# Altium PCB FMC_DIO_32ch_lvds_a.PcbDoc (part 4 of 6)
Units mm, origin at the board's own origin, x right, y up, seen from the top; angles counter-clockwise.
Board outline 69.13 x 77.46 mm, 4 copper layers (Top Layer, G, SUP, Bottom Layer), stack 1.448 mm thick; 558 components, 348 nets, 1996 pads, 784 vias.
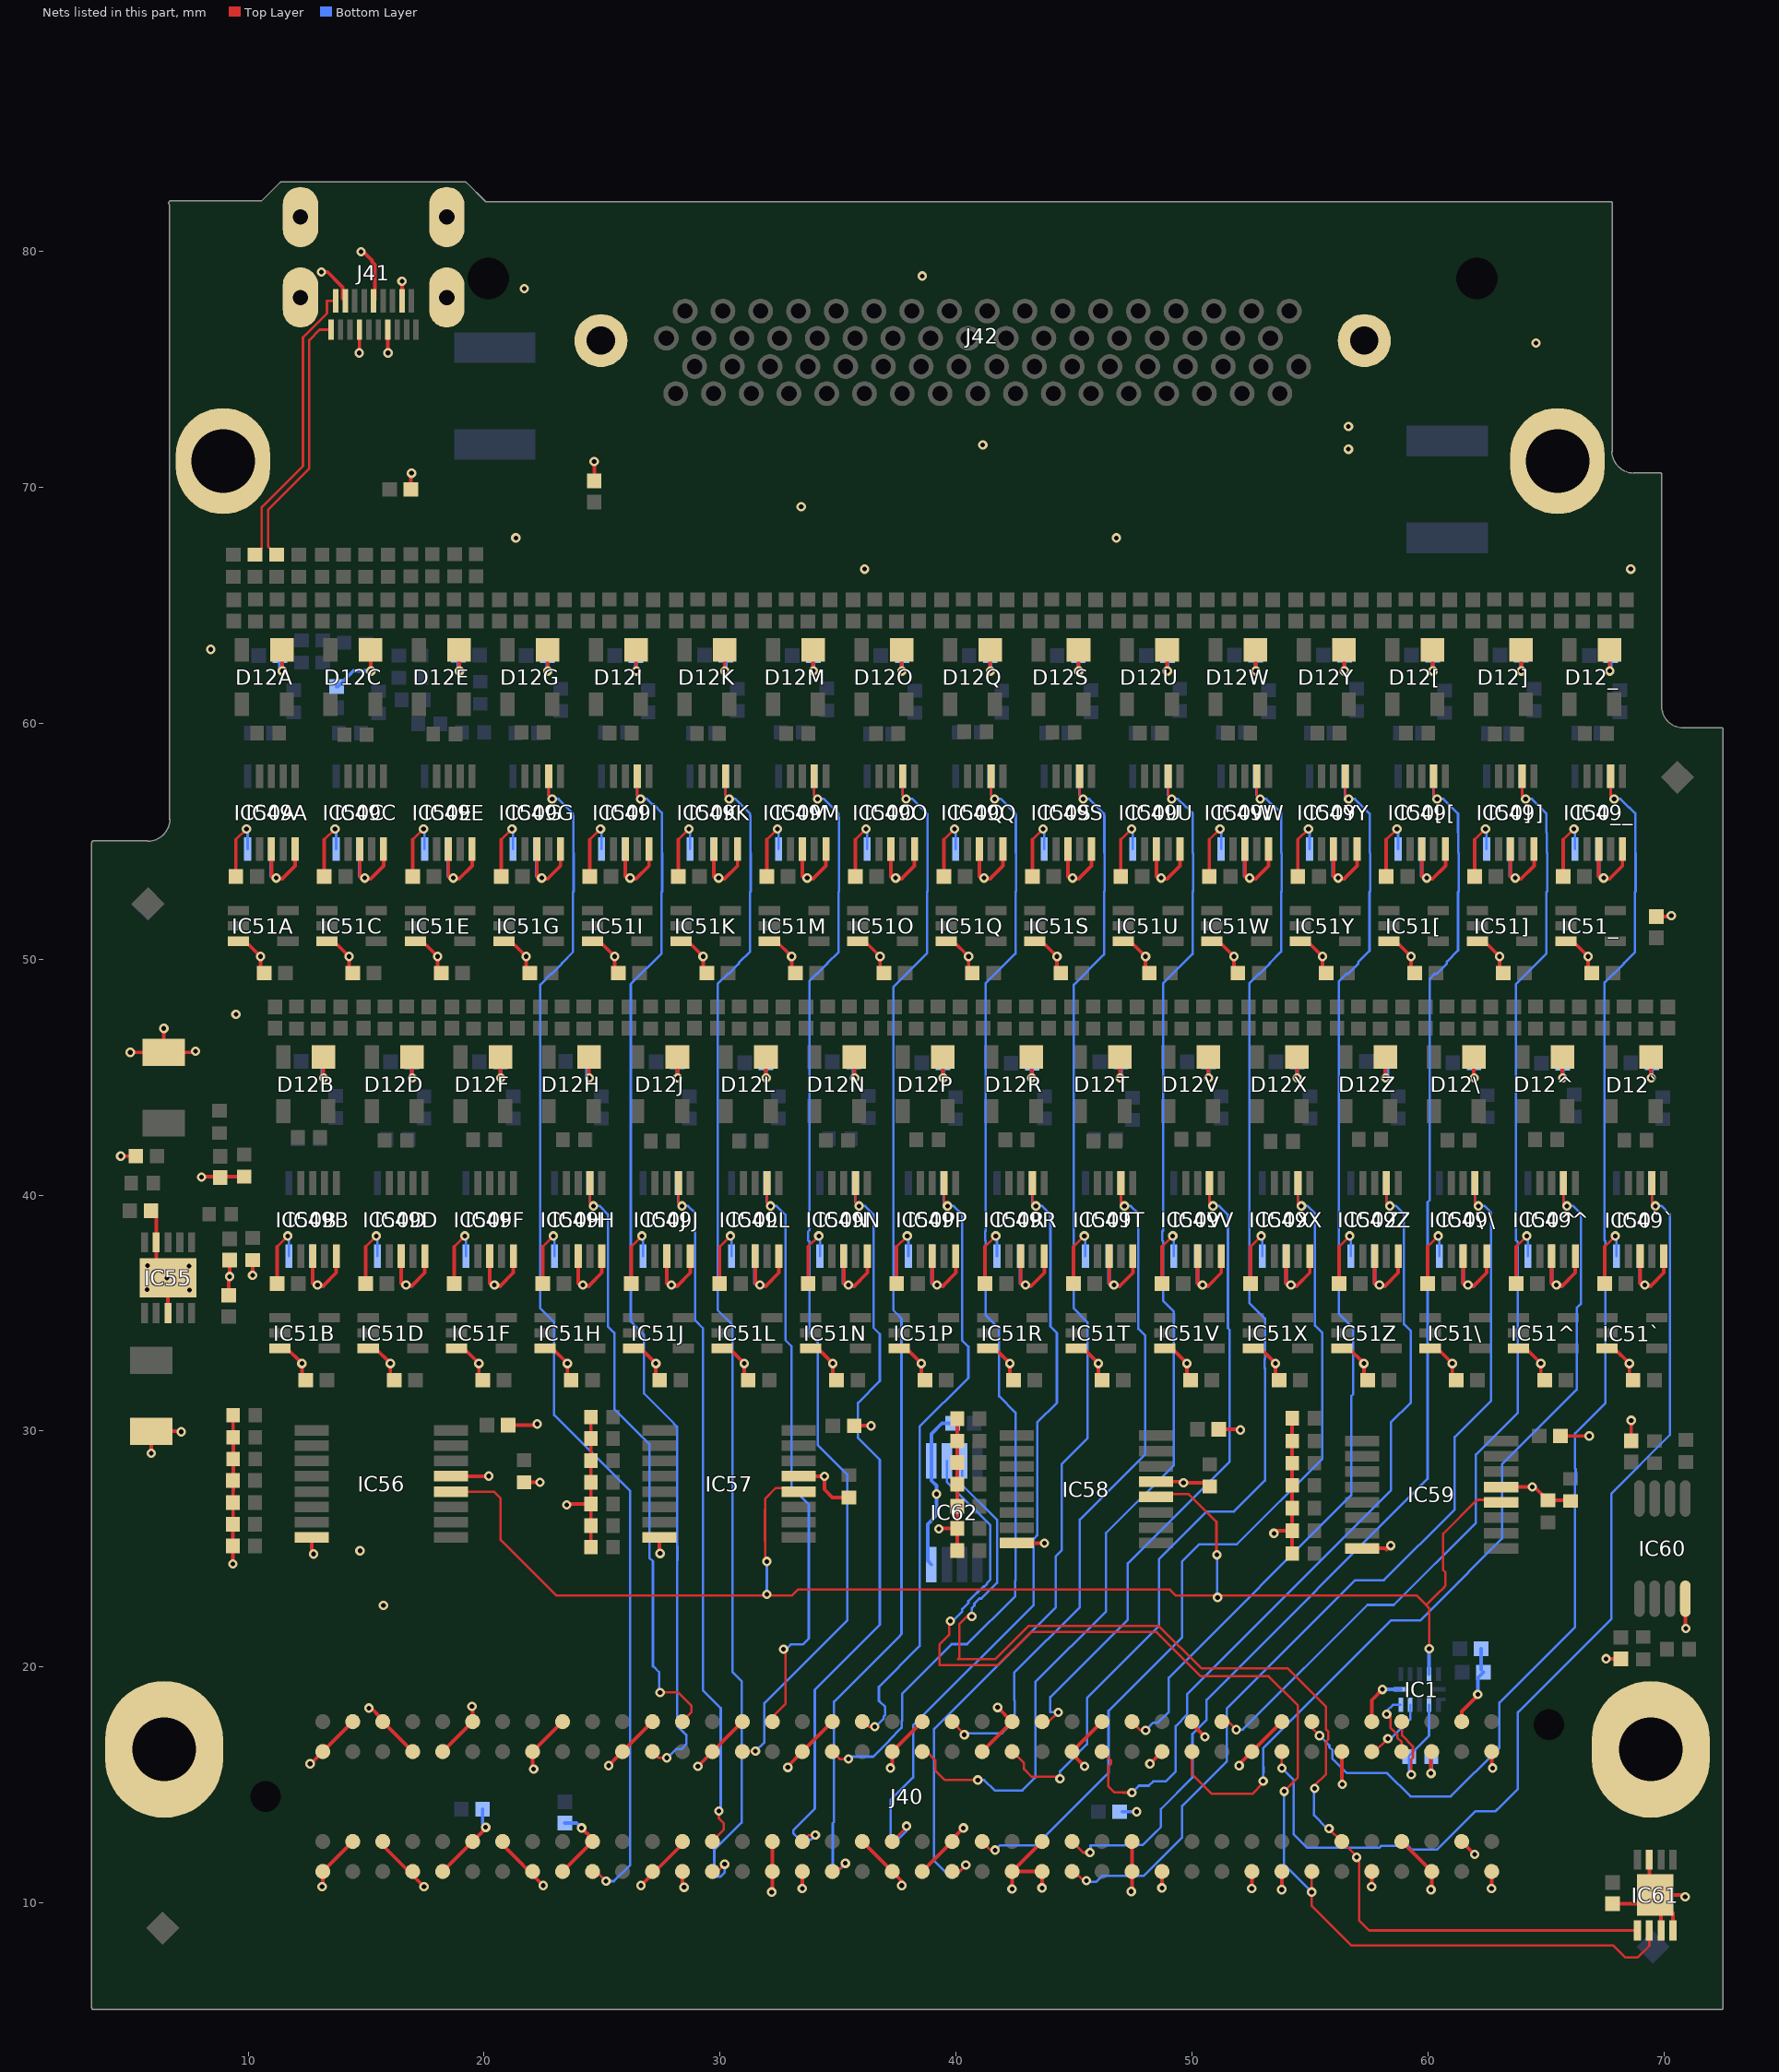
[diagram p6: the nets of this part, all layers, seen from the top]

## Via types
v1: diameter 0.4, hole 0.2, Top Layer to Bottom Layer, tented both sides, 760 vias
v2: diameter 0.4, hole 0.2, Top Layer to Bottom Layer, 24 vias

## Nets (pads, with @x,y where several pads share a name; then routed paths per layer and width w, separated by ;. In a path a pad name is that pad's centre, name@x,y a point inside that pad or via, vN(x,y) a via of type N, cw(c..) or ccw(c..) an arc to the next point about the centre after c; other vN are vias at no path point) (continued)
FMC1_P7: IC49G.6 IC50G.8 J40.c10 | length 52
  Top Layer w0.102: IC49G.6@22.736,57.761 22.736,56.936 v1(22.882,56.79) ; J40.c10@24.592,11.336 24.758,11.336 v1(25.166,10.927)
  Bottom Layer w0.102: IC50G.8@22.728,57.761 22.728,56.944 v1(22.882,56.79) 23.146,56.79 23.768,56.169 23.768,56.086 23.781,56.073 23.781,55.355 23.781,54.512 23.794,54.499 23.794,52.878 23.768,52.852 23.768,50.311 23.296,49.839 23.296,49.811 22.867,49.382 22.839,49.382 22.377,48.92 22.377,35.204 22.962,34.62 22.962,30.683 26.188,27.457 26.188,11.619 25.496,10.927 v1(25.166,10.927)
FMC1_P8: IC49H.6 IC50H.8 J40.h13 | length 26.4
  Top Layer w0.102: IC49H.6@24.486,40.511 24.486,39.686 v1(24.632,39.54) ; v1(27.457,18.923) 28.219,18.923 28.778,18.364 28.778,18.085 28.402,17.709 J40.h13@28.402,17.686
  Bottom Layer w0.102: IC50H.8@24.478,40.511 24.478,39.694 v1(24.632,39.54) 24.896,39.54 25.245,39.192 25.245,34.436 25.518,34.163 25.518,30.946 27.005,29.459 27.005,24.628 27.153,24.481 27.153,20.025 27.172,20.025 27.416,19.781 27.416,18.964 v1(27.457,18.923)
FMC1_P9: IC49I.6 IC50I.8 J40.g12 | length 46
  Top Layer w0.102: IC49I.6@26.486,57.761 26.486,56.936 v1(26.632,56.79) ; J40.g12@27.132,16.416 27.393,16.154 v1(27.737,16.154)
  Bottom Layer w0.102: IC50I.8@26.478,57.761 26.478,56.944 v1(26.632,56.79) 26.896,56.79 27.134,56.553 27.187,56.553 27.531,56.209 27.531,56.184 27.531,55.355 27.531,54.512 27.544,54.499 27.544,52.878 27.518,52.852 27.518,50.251 26.213,48.946 26.213,34.646 26.772,34.087 26.772,31.597 28.042,30.327 28.042,30.309 28.176,30.174 28.176,25.132 28.189,25.119 28.189,24.513 28.176,24.5 28.176,18.322 28.176,17.509 28.443,17.243 28.562,17.124 28.562,16.781 28.562,16.73 28.355,16.523 28.134,16.523 27.766,16.154 v1(27.737,16.154)
FMC1_P10: IC49J.6 IC50J.8 J40.d14 | length 30.1
  Top Layer w0.102: IC49J.6@28.236,40.511 28.236,39.686 v1(28.382,39.54) ; J40.d14@29.672,12.606 29.672,12.629 30.15,13.106 30.15,13.386 29.947,13.589 v1(29.947,13.894)
  Bottom Layer w0.102: IC50J.8@28.228,40.511 28.228,39.694 v1(28.382,39.54) 28.646,39.54 28.944,39.243 28.944,34.69 29.268,34.366 29.268,19.017 30.023,18.262 30.023,13.97 v1(29.947,13.894)
FMC1_P11: IC49K.6 IC50K.8 J40.c14 | length 51.2
  Top Layer w0.102: J40.c14@29.672,11.336 29.882,11.336 v1(30.192,11.646) ; IC49K.6@30.236,57.761 30.236,56.936 v1(30.382,56.79)
  Bottom Layer w0.102: v1(30.192,11.646) 30.192,11.294 30.023,11.125 29.794,11.125 29.752,11.167 29.752,12.252 30.912,13.411 30.912,19.405 30.531,19.786 30.531,34.493 29.896,35.128 29.896,48.946 30.332,49.382 30.367,49.382 30.796,49.811 30.796,49.846 31.268,50.318 31.268,52.852 31.294,52.878 31.294,54.499 31.281,54.512 31.281,55.355 31.281,56.066 31.268,56.079 31.268,56.169 30.646,56.79 v1(30.382,56.79) 30.228,56.944 IC50K.8@30.228,57.761
FMC1_P12: IC49L.6 IC50L.8 J40.h16 | length 25.6
  Top Layer w0.102: IC49L.6@31.986,40.511 31.986,39.686 v1(32.132,39.54) ; J40.h16@32.212,17.686 32.212,17.887 32.766,18.44 32.766,20.549
  Bottom Layer w0.102: IC50L.8@31.978,40.511 31.978,39.694 v1(32.132,39.54) 32.396,39.54 32.77,39.167 32.77,33.852 33.018,33.604 33.018,27.637 33.757,26.898 33.757,21.209 33.503,20.955 32.995,20.955 32.791,20.752 v1(32.69,20.752)
FMC1_P13: IC49M.6 IC50M.8 J40.g15 | length 46.4
  Top Layer w0.102: J40.g15@30.942,16.416 30.96,16.434 v1(31.496,16.434) ; IC49M.6@33.986,57.761 33.986,56.936 v1(34.132,56.79)
  Bottom Layer w0.102: v1(31.496,16.434) 31.877,16.815 31.877,18.47 34.658,21.251 35.382,21.975 35.382,28.162 34.138,29.407 34.138,33.778 33.779,34.137 33.779,38.032 33.728,38.083 33.728,38.458 33.779,38.509 33.779,49.07 34.091,49.382 34.117,49.382 34.546,49.811 34.546,49.837 35.018,50.309 35.018,52.852 35.044,52.878 35.044,54.499 35.031,54.512 35.031,55.999 35.018,56.012 35.018,56.169 34.396,56.79 v1(34.132,56.79) 33.978,56.944 IC50M.8@33.978,57.761
FMC1_P14: IC49N.6 IC50N.8 J40.d17 | length 33.3
  Top Layer w0.102: J40.d17@33.482,12.606 33.754,12.878 v1(34.036,12.878) ; IC49N.6@35.736,40.511 35.736,39.686 v1(35.882,39.54)
  Bottom Layer w0.102: v1(34.036,12.878) 33.846,12.687 33.74,12.687 33.363,12.687 33.096,12.954 33.096,13.081 34.011,13.995 34.011,19.036 36.768,21.793 36.768,28.786 35.839,29.714 35.839,31.191 36.768,32.12 36.768,34.112 36.495,34.386 36.495,39.192 36.146,39.54 v1(35.882,39.54) 35.728,39.694 IC50N.8@35.728,40.511
FMC1_P15: IC49O.6 IC50O.8 J40.c18 | length 51.2
  Top Layer w0.102: J40.c18@34.752,11.336 34.958,11.336 v1(35.306,11.684) ; IC49O.6@37.736,57.761 37.736,56.936 v1(37.882,56.79)
  Bottom Layer w0.102: v1(35.306,11.684) 35.077,11.455 34.874,11.455 34.773,11.557 34.773,13.386 34.823,13.437 34.823,18.528 37.617,21.322 37.617,21.34 37.686,21.409 37.686,34.762 37.617,34.831 37.617,34.849 37.338,35.128 37.338,48.819 38.768,50.249 38.768,52.852 38.794,52.878 38.794,54.499 38.781,54.512 38.781,55.355 38.781,56.161 38.49,56.451 38.485,56.451 38.146,56.79 v1(37.882,56.79) 37.728,56.944 IC50O.8@37.728,57.761
FMC1_P16: IC49P.6 IC50P.8 J40.h19 | length 27.1
  Top Layer w0.102: J40.h19@36.068,17.704 36.297,17.475 v1(36.551,17.475) ; IC49P.6@39.486,40.511 39.486,39.686 v1(39.632,39.54)
  Bottom Layer w0.102: v1@36.569,17.456 36.926,17.812 36.926,17.897 36.992,17.963 36.992,18.308 36.748,18.551 36.728,18.551 36.728,19.163 38.456,20.89 38.456,30.186 40.518,32.249 40.518,33.579 40.259,33.838 40.259,39.178 39.896,39.54 v1(39.632,39.54) 39.478,39.694 IC50P.8@39.478,40.511
FMC1_P17: IC49Q.6 IC50Q.8 J40.g18 | length 49.1
  Top Layer w0.102: J40.g18@34.752,16.416 35.064,16.104 v1(35.433,16.104) ; IC49Q.6@41.486,57.761 41.486,56.936 v1(41.632,56.79)
  Bottom Layer w0.102: v1(35.433,16.104) 35.534,16.205 36.488,16.205 37.16,16.877 37.16,16.895 37.693,17.428 37.693,17.712 37.706,17.724 37.706,18.87 39.807,20.971 40.465,20.971 42.507,23.013 42.507,23.671 42.52,23.684 42.52,30.785 41.824,31.48 41.824,33.207 41.811,33.22 41.811,34.359 41.25,34.921 41.25,38.061 41.228,38.083 41.228,38.458 41.25,38.479 41.25,48.971 42.518,50.24 42.518,52.852 42.544,52.878 42.544,54.499 42.531,54.512 42.531,55.355 42.531,56.094 42.518,56.106 42.518,56.169 41.896,56.79 v1(41.632,56.79) 41.478,56.944 IC50Q.8@41.478,57.761
FMC1_P18: IC49R.6 IC50R.8 J40.d20 | length 34.2
  Top Layer w0.102: J40.d20@37.292,12.606 37.897,13.21 v1(37.897,13.259) ; IC49R.6@43.236,40.511 43.236,39.686 v1(43.382,39.54)
  Bottom Layer w0.102: v1(37.897,13.259) 37.897,13.052 37.603,12.758 37.254,12.758 37.219,12.794 37.219,14.359 38.176,15.316 38.176,17.53 43.286,22.64 43.286,25.435 43.434,25.583 43.434,30.364 44.268,31.198 44.268,34.163 43.995,34.436 43.995,39.192 43.646,39.54 v1(43.382,39.54) 43.228,39.694 IC50R.8@43.228,40.511
FMC1_P19: IC49S.6 IC50S.8 J40.c22 | length 53.5
  Top Layer w0.102: J40.c22@39.832,11.336 40.139,11.336 v1(40.411,11.608) ; IC49S.6@45.236,57.761 45.236,56.936 v1(45.382,56.79)
  Bottom Layer w0.102: v1(40.411,11.608) 40.081,11.278 39.573,11.278 39.065,11.786 39.065,17.385 44.221,22.541 44.221,24.695 44.471,24.944 44.471,28.596 45.568,29.693 45.568,34.62 44.978,35.21 44.978,38.458 44.983,38.463 44.983,48.92 46.268,50.205 46.268,52.852 46.294,52.878 46.294,54.499 46.281,54.512 46.281,56.077 46.268,56.09 46.268,56.169 45.646,56.79 v1(45.382,56.79) 45.228,56.944 IC50S.8@45.228,57.761
FMC1_P20: IC49T.6 IC50T.8 J40.h22 | length 29.8
  Top Layer w0.102: J40.h22@39.832,17.686 40.347,17.17 v1(40.347,17.133) ; IC49T.6@46.986,40.511 46.986,39.686 v1(47.132,39.54)
  Bottom Layer w0.102: v1(40.347,17.133) 40.41,17.196 41.949,17.196 42.469,17.715 42.469,17.982 42.477,17.99 42.477,18.586 42.469,18.594 42.469,19.772 45.237,22.541 45.237,26.249 48.018,29.03 48.018,34.036 47.719,34.335 47.719,39.218 47.396,39.54 v1(47.132,39.54) 46.978,39.694 IC50T.8@46.978,40.511
FMC1_P21: IC49U.6 IC50U.8 J40.g21 | length 53.2
  Top Layer w0.102: J40.g21@38.562,16.416 38.753,16.416 39.116,16.053 39.116,15.625 39.526,15.215 v1(40.919,15.215) ; IC49U.6@48.986,57.761 48.986,56.936 v1(49.132,56.79)
  Bottom Layer w0.102: v1(40.919,15.215) 41.19,15.215 41.634,14.77 42.808,14.77 43.358,15.32 43.358,19.366 46.355,22.363 46.355,25.69 49.225,28.561 49.225,35.067 48.768,35.524 48.768,38.043 48.728,38.083 48.728,38.458 48.768,38.498 48.768,48.971 50.018,50.221 50.018,52.852 50.044,52.878 50.044,54.499 50.031,54.512 50.031,56.188 49.767,56.451 49.735,56.451 49.396,56.79 v1(49.132,56.79) 48.978,56.944 IC50U.8@48.978,57.761
FMC1_P22: IC49V.6 IC50V.8 J40.h25 | length 28.4
  Top Layer w0.102: J40.h25@43.642,17.686 J40.h25@43.822,17.686 ; J40.h25@43.822,17.813 J40.h25@43.822,17.686 ; v1(44.323,18.085) 43.924,17.686 J40.h25@43.822,17.686 ; IC49V.6@50.736,40.511 50.736,39.686 v1(50.882,39.54)
  Bottom Layer w0.102: v1(44.323,18.085) 43.993,18.085 43.993,18.731 47.269,22.007 47.269,24.395 51.592,28.718 51.592,34.288 51.52,34.36 51.52,39.167 51.146,39.54 v1(50.882,39.54) 50.728,39.694 IC50V.8@50.728,40.511
FMC1_P23: IC49W.6 IC50W.8 J40.g24 | length 51.9
  Top Layer w0.102: J40.g24@42.372,16.416 42.385,16.416 42.875,15.926 42.875,15.676 43.197,15.354 44.31,15.354 v1(44.399,15.265) ; IC49W.6@52.736,57.761 52.736,56.936 v1(52.882,56.79)
  Bottom Layer w0.102: v1(44.399,15.265) 44.399,15.581 45.542,16.724 45.542,18.68 48.59,21.728 48.59,24.562 50.622,26.594 51.779,26.594 53.086,27.9 53.086,32.665 53.074,32.677 53.074,33.052 53.086,33.064 53.086,34.772 52.426,35.433 52.426,48.971 52.837,49.382 52.867,49.382 53.296,49.811 53.296,49.842 53.768,50.314 53.768,52.852 53.794,52.878 53.794,54.499 53.781,54.512 53.781,56.197 53.501,56.477 53.46,56.477 53.146,56.79 v1(52.882,56.79) 52.728,56.944 IC50W.8@52.728,57.761
FMC1_P24: IC49X.6 IC50X.8 J40.d23 | length 38.2
  Top Layer w0.102: J40.d23@41.102,12.606 41.465,12.243 v1(41.656,12.243) ; IC49X.6@54.486,40.511 54.486,39.686 v1(54.632,39.54)
  Bottom Layer w0.102: v1(41.656,12.243) 41.859,12.446 43.397,12.446 46.443,15.492 46.457,15.505 46.457,18.147 49.581,21.271 49.581,24.481 50.308,25.208 51.9,25.208 55.518,28.826 55.518,34.163 55.207,34.474 55.207,39.23 54.896,39.54 v1(54.632,39.54) 54.478,39.694 IC50X.8@54.478,40.511
FMC1_P25: IC49Y.6 IC50Y.8 J40.h28 | length 47.4
  Top Layer w0.102: J40.h28@47.452,17.686 47.815,17.323 v1(48.031,17.323) ; IC49Y.6@56.486,57.761 56.486,56.936 v1(56.632,56.79)
  Bottom Layer w0.102: v1(48.031,17.323) 48.355,17.647 48.548,17.647 49.009,18.108 49.009,19.545 56.738,27.274 56.738,31.476 56.825,31.563 56.825,32.676 56.824,32.677 56.824,33.052 56.825,33.053 56.825,34.361 56.21,34.976 56.21,49.047 56.545,49.382 56.617,49.382 57.046,49.811 57.046,49.883 57.518,50.355 57.518,52.852 57.544,52.878 57.544,54.499 57.531,54.512 57.531,55.355 57.531,56.156 57.518,56.169 56.896,56.79 v1(56.632,56.79) 56.478,56.944 IC50Y.8@56.478,57.761
FMC1_P26: IC49Z.6 IC50Z.8 J40.g27 | length 35.7
  Top Layer w0.102: J40.g27@46.182,16.416 46.558,16.04 46.558,15.899 46.444,15.785 46.444,14.952 46.702,14.694 47.053,14.694 47.066,14.681 v1(47.447,14.681) ; IC49Z.6@58.236,40.511 58.236,39.686 v1(58.382,39.54)
  Bottom Layer w0.102: v1(47.447,14.681) 47.739,14.973 48.163,14.973 48.345,15.155 48.882,15.155 49.301,15.574 49.301,17.501 49.795,17.994 49.795,18.858 58.42,27.483 58.42,30.364 59.268,31.212 59.268,34.239 58.979,34.528 58.979,39.208 58.646,39.54 v1(58.382,39.54) 58.228,39.694 IC50Z.8@58.228,40.511
FMC1_P27: IC49[.6 IC50[.8 J40.d26 | length 56
  Top Layer w0.102: J40.d26@44.912,12.606 45.377,12.141 v1(45.669,12.141) ; IC49[.6@60.236,57.761 60.236,56.936 v1(60.382,56.79)
  Bottom Layer w0.102: v1(45.669,12.141) 45.695,12.167 45.695,12.446 47.157,12.446 47.17,12.459 47.913,12.459 48.349,12.894 48.679,13.225 48.679,13.987 50.013,15.32 50.013,17.17 50.611,17.769 50.611,18.611 59.978,27.978 59.978,39.702 60.071,39.795 60.071,49.174 60.279,49.382 60.367,49.382 60.796,49.811 60.796,49.899 61.268,50.371 61.268,52.852 61.294,52.878 61.294,54.499 61.281,54.512 61.281,55.355 61.268,55.367 61.268,56.169 60.646,56.79 v1(60.382,56.79) 60.228,56.944 IC50[.8@60.228,57.761
FMC1_P28: IC49\.6 IC50\.8 J40.c26 | length 41
  Top Layer w0.102: J40.c26@44.912,11.336 45.02,11.336 v1@45.45,10.906 ; IC49\.6@61.986,40.511 61.986,39.686 v1(62.132,39.54)
  Bottom Layer w0.102: v1@45.45,10.906 45.45,10.897 45.923,10.897 46.177,11.15 47.944,11.15 49.581,12.787 49.581,14.122 51.473,16.015 51.473,18.25 56.909,23.685 58.124,23.685 61.125,26.687 61.125,29.746 62.668,31.289 62.668,39.268 62.396,39.54 v1(62.132,39.54) 61.978,39.694 IC50\.8@61.978,40.511
  other v1: 45.517,10.947
FMC1_P29: IC49].6 IC50].8 J40.h31 | length 49.1
  Top Layer w0.102: J40.h31@51.262,17.686 51.529,17.686 v1(51.867,17.348) ; IC49].6@63.986,57.761 63.986,56.936 v1(64.132,56.79)
  Bottom Layer w0.102: v1(51.867,17.348) 52.146,17.348 57.429,22.631 58.543,22.631 62.027,26.115 62.027,29.011 63.805,30.789 63.805,38.006 63.728,38.083 63.728,48.945 65.018,50.235 65.018,52.852 65.044,52.878 65.044,54.499 65.031,54.512 65.031,55.355 65.018,55.367 65.018,56.169 64.396,56.79 v1(64.132,56.79) 63.978,56.944 IC50].8@63.978,57.761
FMC1_P30: IC49^.6 IC50^.8 J40.g30 | length 37.7
  Top Layer w0.102: J40.g30@49.992,16.416 49.992,15.464 50.825,14.63 52.553,14.63 53.01,15.088 v1(53.01,15.164) ; IC49^.6@65.736,40.511 65.736,39.686 v1(65.882,39.54)
  Bottom Layer w0.102: v1(53.01,15.164) 53.01,15.523 53.023,15.536 53.023,15.757 53.01,15.77 53.01,16.561 58.42,21.971 59.665,21.971 61.307,23.613 61.313,23.613 61.705,24.005 61.705,24.012 63.132,25.438 63.132,28.592 66.294,31.754 66.294,35.208 66.47,35.385 66.47,39.216 66.146,39.54 v1(65.882,39.54) 65.728,39.694 IC50^.8@65.728,40.511
FMC1_P31: IC49_.6 IC50_.8 J40.h34 | length 55.8
  Top Layer w0.102: J40.h34@55.072,17.686 55.072,17.419 v1(55.397,17.094) ; IC49_.6@67.736,57.761 67.736,56.936 v1(67.882,56.79)
  Bottom Layer w0.102: v1(55.397,17.094) 55.816,16.675 55.816,16.603 55.945,16.474 55.945,16.114 56.553,15.507 58.259,15.507 59.249,14.516 60.962,14.516 63.019,16.573 63.019,18.493 66.229,21.702 66.229,27.772 66.251,27.795 66.251,28.39 66.229,28.413 66.229,29.91 67.513,31.195 67.513,38.048 67.478,38.083 67.478,49.012 67.848,49.382 67.867,49.382 68.296,49.811 68.296,49.83 68.768,50.302 68.768,52.852 68.794,52.878 68.794,54.499 68.781,54.512 68.781,56.183 68.538,56.426 68.511,56.426 68.146,56.79 v1(67.882,56.79) 67.728,56.944 IC50_.8@67.728,57.761
FMC1_P32: IC49`.6 IC50`.8 J40.g33 | length 44.5
  Top Layer w0.102: v1(53.802,15.718) J40.g33@53.802,16.416 ; IC49`.6@69.486,40.511 69.486,39.686 v1(69.632,39.54)
  Bottom Layer w0.102: v1(53.802,15.718) 54.304,15.216 54.304,12.908 54.872,12.34 57.923,12.34 57.999,12.417 59.16,12.417 59.316,12.26 60.377,12.26 62.01,13.894 62.861,13.894 62.925,13.957 63.805,14.837 63.805,18.089 67.767,22.051 67.767,27.356 70.245,29.833 70.245,39.192 69.896,39.54 v1(69.632,39.54) 69.478,39.694 IC50`.8@69.478,40.511
GA0: IC61.2 IC62.6 J40.c34 | length 53.5
  Top Layer w0.102: v1(39.752,21.945) 39.7,21.996 39.7,21.361 39.294,20.955 39.294,20.078 41.758,20.078 43.168,21.488 48.488,21.488 50.368,19.609 53.238,19.609 54.483,18.364 54.483,15.316 v2(53.899,14.732) ; J40.c34@55.072,11.336 55.072,9.876 56.744,8.204 67.843,8.204 68.351,7.696 68.885,7.696 69.371,8.183 IC61.2@69.371,8.838
  Bottom Layer w0.102: IC62.6@39.604,28.743 39.604,27.859 41.453,26.01 41.453,23.698 41.307,23.552 41.307,23.519 41.202,23.415 41.17,23.415 40.916,23.162 40.886,23.162 40.516,22.791 40.516,22.714 40.259,22.457 40.259,22.351 v1@39.929,22.021 ; v2(53.899,14.732) 53.899,11.633 v1(55.067,10.465)
GA1: IC61.1 IC62.7 J40.d35 | length 49.6
  Top Layer w0.102: v1(40.665,22.149) 40.564,22.25 40.13,21.816 40.13,20.381 40.081,20.332 41.653,20.332 43.063,21.742 48.593,21.742 50.397,19.939 54.051,19.939 55.677,18.313 55.677,17.349 55.775,17.251 55.775,16.938 55.677,16.839 55.677,15.469 55.194,14.986 v2(55.194,14.859) ; v2(55.804,13.157) 55.804,13.144 J40.d35@56.342,12.606 v1@56.991,11.957 ; v1@57.074,11.874 57.074,9.271 57.507,8.838 IC61.1@68.871,8.838
  Bottom Layer w0.102: IC62.7@40.254,28.743 40.254,27.717 41.732,26.238 41.732,23.571 41.069,22.908 40.992,22.908 40.77,22.686 40.77,22.609 40.665,22.504 v1(40.665,22.149) ; v2(55.194,14.859) 55.169,14.859 55.169,13.716 55.728,13.157 v2(55.804,13.157)
  other v1: 56.972,11.938
GND: B8.1 B9.1 B10.1 B11.1 C1.2 C2.2 C127[.1 C127\.1 C127].1 C127^.1 C127_.1 C127`.1 C127A.1 C127B.1 C127C.1 C127D.1 C127E.1 C127F.1 C127G.1 C127H.1 C127I.1 C127J.1 C127K.1 C127L.1 C127M.1 C127N.1 C127O.1 C127P.1 C127Q.1 C127R.1 C127S.1 C127T.1 C127U.1 C127V.1 C127W.1 C127X.1 C127Y.1 C127Z.1 C128[.1 C128\.1 C128].1 C128^.1 C128_.1 C128`.1 C128A.1 C128B.1 C128C.1 C128D.1 C128E.1 C128F.1 C128G.1 C128H.1 C128I.1 C128J.1 C128K.1 C128L.1 C128M.1 C128N.1 C128O.1 C128P.1 C128Q.1 C128R.1 C128S.1 C128T.1 C128U.1 C128V.1 C128W.1 C128X.1 C128Y.1 C128Z.1 C139[.1 C139\.1 C139].1 C139^.1 C139_.1 C139`.1 C139A.1 C139B.1 C139C.1 C139D.1 C139E.1 C139F.1 C139G.1 C139H.1 C139I.1 C139J.1 C139K.1 C139L.1 C139M.1 C139N.1 C139O.1 C139P.1 C139Q.1 C139R.1 C139S.1 C139T.1 C139U.1 C139V.1 C139W.1 C139X.1 C139Y.1 C139Z.1 C146.1 C147.1 C148.1 C149.1 C150.2 C151.1 C152.1 C153.1 C154.1 C155.1 C156.1 C157.2 C158.2 C159.2 C160.2 C161.2 C162.2 C163.1 C164.1 C165.1 C166.1 D12[.1 D12\.1 D12].1 D12^.1 D12_.1 D12`.1 D12A.1 D12B.1 D12C.1 D12D.1 D12E.1 D12F.1 D12G.1 D12H.1 D12I.1 D12J.1 D12K.1 D12L.1 D12M.1 D12N.1 D12O.1 D12P.1 D12Q.1 D12R.1 D12S.1 D12T.1 D12U.1 D12V.1 D12W.1 D12X.1 D12Y.1 D12Z.1 IC1.6 IC49[.2 IC49[.4 IC49\.2 IC49\.4 IC49].2 IC49].4 IC49^.2 IC49^.4 IC49_.2 IC49_.4 IC49`.2 IC49`.4 IC49A.2 IC49A.4 IC49B.2 IC49B.4 IC49C.2 IC49C.4 IC49D.2 IC49D.4 IC49E.2 IC49E.4 IC49F.2 IC49F.4 IC49G.2 IC49G.4 IC49H.2 IC49H.4 IC49I.2 IC49I.4 IC49J.2 IC49J.4 IC49K.2 IC49K.4 IC49L.2 IC49L.4 IC49M.2 IC49M.4 IC49N.2 IC49N.4 IC49O.2 IC49O.4 IC49P.2 IC49P.4 IC49Q.2 IC49Q.4 IC49R.2 IC49R.4 IC49S.2 IC49S.4 IC49T.2 IC49T.4 IC49U.2 IC49U.4 IC49V.2 IC49V.4 IC49W.2 IC49W.4 IC49X.2 IC49X.4 IC49Y.2 IC49Y.4 IC49Z.2 IC49Z.4 IC50[.2 IC50[.4 IC50\.2 IC50\.4 IC50].2 IC50].4 IC50^.2 IC50^.4 IC50_.2 IC50_.4 IC50`.2 IC50`.4 IC50A.2 IC50A.4 IC50B.2 IC50B.4 IC50C.2 IC50C.4 IC50D.2 IC50D.4 IC50E.2 IC50E.4 IC50F.2 IC50F.4 IC50G.2 IC50G.4 IC50H.2 IC50H.4 IC50I.2 IC50I.4 IC50J.2 IC50J.4 IC50K.2 IC50K.4 IC50L.2 IC50L.4 IC50M.2 IC50M.4 IC50N.2 IC50N.4 IC50O.2 IC50O.4 IC50P.2 IC50P.4 IC50Q.2 IC50Q.4 IC50R.2 IC50R.4 IC50S.2 IC50S.4 IC50T.2 IC50T.4 IC50U.2 IC50U.4 IC50V.2 IC50V.4 IC50W.2 IC50W.4 IC50X.2 IC50X.4 IC50Y.2 IC50Y.4 IC50Z.2 IC50Z.4 IC51[.3 IC51\.3 IC51].3 IC51^.3 IC51_.3 IC51`.3 IC51A.3 IC51B.3 IC51C.3 IC51D.3 IC51E.3 IC51F.3 IC51G.3 IC51H.3 IC51I.3 IC51J.3 IC51K.3 IC51L.3 IC51M.3 IC51N.3 IC51O.3 IC51P.3 IC51Q.3 IC51R.3 IC51S.3 IC51T.3 IC51U.3 IC51V.3 IC51W.3 IC51X.3 IC51Y.3 IC51Z.3 IC55.4 IC55.8 IC55.11 IC56.8 IC56.13 IC57.8 IC57.13 IC58.8 IC58.13 IC59.8 IC59.13 IC60.4 IC61.3 IC61.4 IC61.7 IC61.9 IC62.4 IC62.5 J40.c1 J40.c4 J40.c5 J40.c8 J40.c9 J40.c12 J40.c13 J40.c16 J40.c17 J40.c20 J40.c21 J40.c24 J40.c25 J40.c28 J40.c29 J40.c32 J40.c33 J40.c36 J40.c38 J40.c40 J40.d2 J40.d3 J40.d6 J40.d7 J40.d10 J40.d13 J40.d16 J40.d19 J40.d22 J40.d25 J40.d28 J40.d37 J40.d39 J40.g1 J40.g4 J40.g5 J40.g8 J40.g11 J40.g14 J40.g17 J40.g20 J40.g23 J40.g26 J40.g29 J40.g32 J40.g35 J40.g38 J40.g40 J40.h2 J40.h3 J40.h6 J40.h9 J40.h12 J40.h15 J40.h18 J40.h21 J40.h24 J40.h27 J40.h30 J40.h33 J40.h36 J40.h39 J41.4 J41.7 J41.10 J41.13 J41.16 J41.SHIELD J42.69 J42.70 R2.1 R253.1 R255.1 R256.2 R257.2 R258.2 R259.2 R260.2 R261.2 R262.2 R263.2 R264.2 R269.2 R274.2 R279.2 R284.2 R289.2 R290.2 R291.2 R292.2 R293.2 R294.2 R295.2 R296.2 R297.2 R298.2 R299.2 R300.2 R301.2 R302.2 R303.2 R304.2 R305.2 R306.2 R307.2 R308.2 | length 534.8
  Top Layer w0.102: 9.477,55.067 v1(9.93,55.52) ; 11.227,37.817 v1(11.68,38.27) ; 13.227,55.067 v1(13.68,55.52) ; 14.977,37.817 v1(15.43,38.27) ; 16.977,55.067 v1(17.43,55.52) ; 18.727,37.817 v1(19.18,38.27) ; 20.727,55.067 v1(21.18,55.52) ; 22.477,37.817 v1(22.93,38.27) ; 24.477,55.067 v1(24.93,55.52) ; 26.227,37.817 v1(26.68,38.27) ; 28.227,55.067 v1(28.68,55.52) ; 29.977,37.817 v1(30.43,38.27) ; 31.977,55.067 v1(32.43,55.52) ; 33.727,37.817 v1(34.18,38.27) ; 35.727,55.067 v1(36.18,55.52) ; 37.477,37.817 v1(37.93,38.27) ; 39.477,55.067 v1(39.93,55.52) ; 41.227,37.817 v1(41.68,38.27) ; 43.227,55.067 v1(43.68,55.52) ; 44.977,37.817 v1(45.43,38.27) ; 46.977,55.067 v1(47.43,55.52) ; 48.727,37.817 v1(49.18,38.27) ; 50.727,55.067 v1(51.18,55.52) ; 52.477,37.817 v1(52.93,38.27) ; 54.477,55.067 v1(54.93,55.52) ; 56.227,37.817 v1(56.68,38.27) ; 58.227,55.067 v1(58.68,55.52) ; 59.977,37.817 v1(60.43,38.27) ; 61.977,55.067 v1(62.43,55.52) ; 63.727,37.817 v1(64.18,38.27) ; 65.727,55.067 v1(66.18,55.52) ; 67.477,37.817 v1(67.93,38.27)
  Top Layer w0.152: v1(4.597,41.656) C151.1@5.24,41.656 ; v1(5.004,46.05) 5.005,46.052 C147.1@6.426,46.052 ; C150.2@5.886,39.345 6.104,39.126 IC55.4@6.104,38 6.104,37 IC55.11@6.604,36.5 IC55.8@6.604,35 ; v1(5.893,29.058) C148.1@5.893,29.996 7.139,29.996 v1(7.163,29.972) ; v1(6.426,47.066) C147.1@6.426,46.052 ; v1(7.772,46.101) 7.723,46.052 C147.1@6.426,46.052 ; v1(8.026,40.767) 8.039,40.78 R255.1@9.83,40.78 ; C146.1@9.169,35.756 9.169,36.5 v1(9.22,36.551) C149.1@9.22,37.244 ; v1(9.347,24.375) 9.352,24.379 R263.2@9.352,25.137 R263.2@9.352,25.387 ; R262.2@9.352,26.042 R263.2@9.352,25.387 ; R257.2@9.36,30.674 R258.2@9.36,29.734 ; C128A.1@9.477,53.502 9.477,55.067 ; IC51A.3@9.586,50.761 9.88,50.761 v1(10.527,50.114) 10.527,49.571 C127A.1@10.686,49.411 ; v1(10.185,36.601) R253.1@10.185,37.249 ; IC49A.2@10.986,54.661 10.986,53.511 11.086,53.411 11.436,53.411 11.986,53.961 IC49A.4@11.986,54.661 ; C128B.1@11.227,36.252 11.227,37.817 ; IC51B.3@11.336,33.511 11.63,33.511 v1(12.277,32.864) 12.277,32.321 C127B.1@12.436,32.161 ; D12A.1@11.439,63.11 11.439,62.226 v1(11.451,62.214) ; v1(12.624,15.9) 12.647,15.9 J40.g1@13.162,16.416 J40.h2@14.432,17.686 ; IC56.8@12.696,25.487 12.696,24.87 v1(12.776,24.79) ; IC49B.2@12.736,37.411 12.736,36.261 12.836,36.161 13.186,36.161 13.736,36.711 IC49B.4@13.736,37.411 ; v1(13.106,79.121) 13.366,79.121 13.905,78.583 14.009,78.478 14.009,78.012 J41.4@14.116,77.905 ; v1(13.132,10.693) 13.162,10.724 J40.c1@13.162,11.336 J40.d2@14.432,12.606 ; D12B.1@13.189,45.86 13.189,44.976 v1(13.201,44.964) ; C128C.1@13.227,53.502 13.227,55.067 ; IC51C.3@13.336,50.761 13.63,50.761 v1(14.277,50.114) 14.277,49.571 C127C.1@14.436,49.411 ; v1(14.707,75.692) 14.716,75.702 J41.7@14.716,76.68 ; IC49C.2@14.736,54.661 14.736,53.511 14.836,53.411 15.186,53.411 15.736,53.961 IC49C.4@15.736,54.661 ; v1(14.783,79.985) 14.884,79.985 15.253,79.616 15.253,79.545 15.363,79.434 15.363,77.952 J41.10@15.316,77.905 ; C128D.1@14.977,36.252 14.977,37.817 ; IC51D.3@15.086,33.511 15.38,33.511 v1(16.027,32.864) 16.027,32.321 C127D.1@16.186,32.161 ; v1(15.113,18.263) 15.113,18.364 15.702,17.775 J40.h3@15.702,17.686 J40.g4@16.972,16.416 ; D12C.1@15.189,63.11 15.189,62.226 v1(15.201,62.214) ; J40.d3@15.702,12.606 15.702,12.441 v1(17.45,10.693) ; J41.13@15.916,76.68 15.916,75.702 v1(15.926,75.692) ; IC49D.2@16.486,37.411 16.486,36.261 16.586,36.161 16.936,36.161 17.486,36.711 IC49D.4@17.486,37.411 ; J41.16@16.516,77.905 v1(16.516,78.734) ; C158.2@16.891,69.91 16.891,70.564 v1(16.924,70.596) ; D12D.1@16.939,45.86 16.939,44.976 v1(16.951,44.964) ; C128E.1@16.977,53.502 16.977,55.067 ; IC51E.3@17.086,50.761 17.38,50.761 v1(18.027,50.114) 18.027,49.571 C127E.1@18.186,49.411 ; J40.c5@18.242,11.336 J40.d6@19.512,12.606 20.066,13.16 v1(20.066,13.208) ; J40.g5@18.242,16.416 J40.h6@19.512,17.686 19.512,18.308 v1(19.482,18.339) ; IC49E.2@18.486,54.661 18.486,53.511 18.586,53.411 18.936,53.411 19.486,53.961 IC49E.4@19.486,54.661 ; IC56.13@18.596,28.087 20.188,28.087 v1(20.193,28.092) ; C128F.1@18.727,36.252 18.727,37.817 ; IC51F.3@18.836,33.511 19.13,33.511 v1(19.777,32.864) 19.777,32.321 C127F.1@19.936,32.161 ; D12E.1@18.939,63.11 18.939,62.226 v1(18.951,62.214) ; IC49F.2@20.236,37.411 20.236,36.261 20.336,36.161 20.686,36.161 21.236,36.711 IC49F.4@21.236,37.411 ; D12F.1@20.689,45.86 20.689,44.976 v1(20.701,44.964) ; C128G.1@20.727,53.502 20.727,55.067 ; J40.d7@20.782,12.606 20.782,12.466 v1(22.504,10.744) ; IC51G.3@20.836,50.761 21.13,50.761 v1(21.777,50.114) 21.777,49.571 C127G.1@21.936,49.411 ; C156.1@21.024,30.251 22.2,30.251 v1(22.25,30.302) ; R256.2@21.692,27.826 v1(22.365,27.826) ; v1(22.098,15.672) 22.052,15.718 J40.g8@22.052,16.416 J40.h9@23.322,17.686 ; IC49G.2@22.236,54.661 22.236,53.511 22.336,53.411 22.686,53.411 23.236,53.961 IC49G.4@23.236,54.661 ; C128H.1@22.477,36.252 22.477,37.817 ; IC51H.3@22.586,33.511 22.88,33.511 v1(23.527,32.864) 23.527,32.321 C127H.1@23.686,32.161 ; D12G.1@22.689,63.11 22.689,62.226 v1(22.701,62.214) ; J40.c9@23.322,11.336 J40.d10@24.592,12.606 24.592,12.72 v1(24.13,13.183) ; v1(23.495,26.877) 23.533,26.915 R289.2@24.524,26.915 ; IC49H.2@23.986,37.411 23.986,36.261 24.086,36.161 24.436,36.161 24.986,36.711 IC49H.4@24.986,37.411 ; D12H.1@24.439,45.86 24.439,44.976 v1(24.451,44.964) ; C128I.1@24.477,53.502 24.477,55.067 ; R291.2@24.524,25.086 R290.2@24.524,26 R289.2@24.524,26.915 ; R269.2@24.524,30.598 R274.2@24.524,29.683 R279.2@24.524,28.743 R284.2@24.524,27.829 R289.2@24.524,26.915 ; IC51I.3@24.586,50.761 24.88,50.761 v1(25.527,50.114) 25.527,49.571 C127I.1@25.686,49.411 ; 24.663,70.612 v1(24.663,71.095) ; v1(25.273,15.824) 25.273,15.827 J40.g11@25.862,16.416 J40.h12@27.132,17.686 ; IC49I.2@25.986,54.661 25.986,53.511 26.086,53.411 26.436,53.411 26.986,53.961 IC49I.4@26.986,54.661 ; C128J.1@26.227,36.252 26.227,37.817 ; IC51J.3@26.336,33.511 26.63,33.511 v1(27.277,32.864) 27.277,32.321 C127J.1@27.436,32.161 ; D12I.1@26.439,63.11 26.439,62.226 v1(26.451,62.214) ; v1(26.645,10.744) 28.402,12.502 J40.d13@28.402,12.606 ; IC57.8@27.428,25.487 27.428,24.845 v1(27.457,24.816) ; IC49J.2@27.736,37.411 27.736,36.261 27.836,36.161 28.186,36.161 28.736,36.711 IC49J.4@28.736,37.411 ; D12J.1@28.189,45.86 28.189,44.976 v1(28.201,44.964) ; C128K.1@28.227,53.502 28.227,55.067 ; IC51K.3@28.336,50.761 28.63,50.761 v1(29.277,50.114) 29.277,49.571 C127K.1@29.436,49.411 ; J40.c13@28.402,11.336 28.402,10.739 v1(28.473,10.668) ; v1(29.058,15.799) 30.942,17.683 J40.h15@30.942,17.686 ; IC49K.2@29.736,54.661 29.736,53.511 29.836,53.411 30.186,53.411 30.736,53.961 IC49K.4@30.736,54.661 ; C128L.1@29.977,36.252 29.977,37.817 ; IC51L.3@30.086,33.511 30.38,33.511 v1(31.027,32.864) 31.027,32.321 C127L.1@31.186,32.161 ; D12K.1@30.189,63.11 30.189,62.226 v1(30.201,62.214) ; IC49L.2@31.486,37.411 31.486,36.261 31.586,36.161 31.936,36.161 32.486,36.711 IC49L.4@32.486,37.411 ; D12L.1@31.939,45.86 31.939,44.976 v1(31.951,44.964) ; C128M.1@31.977,53.502 31.977,55.067 ; IC51M.3@32.086,50.761 32.38,50.761 v1(33.027,50.114) 33.027,49.571 C127M.1@33.186,49.411 ; v1(32.182,10.465) 32.212,10.495 J40.c16@32.212,11.336 J40.d16@32.212,12.606 ; v1(32.868,15.748) 32.868,15.801 J40.g17@33.482,16.416 J40.h18@34.752,17.686 ; IC57.13@33.328,28.087 v1(34.422,28.087) 34.422,27.528 34.76,27.191 R264.2@35.458,27.191 ; v1(33.477,10.617) 33.482,10.622 J40.c17@33.482,11.336 ; IC49M.2@33.486,54.661 33.486,53.511 33.586,53.411 33.936,53.411 34.486,53.961 IC49M.4@34.486,54.661 ; C128N.1@33.727,36.252 33.727,37.817 ; IC51N.3@33.836,33.511 34.13,33.511 v1(34.777,32.864) 34.777,32.321 C127N.1@34.936,32.161 ; D12M.1@33.939,63.11 33.939,62.226 v1(33.951,62.214) ; IC49N.2@35.236,37.411 35.236,36.261 35.336,36.161 35.686,36.161 36.236,36.711 IC49N.4@36.236,37.411 ; C155.1@35.68,30.226 v1(36.398,30.226) ; D12N.1@35.689,45.86 35.689,44.976 v1(35.701,44.964) ; C128O.1@35.727,53.502 35.727,55.067 ; IC51O.3@35.836,50.761 36.13,50.761 v1(36.777,50.114) 36.777,49.571 C127O.1@36.936,49.411 ; J40.d19@36.022,12.606 J40.c20@37.292,11.336 37.694,10.934 v1(37.694,10.744) ; v1(37.211,15.723) 37.292,15.804 J40.g20@37.292,16.416 J40.h21@38.562,17.686 ; IC49O.2@37.236,54.661 37.236,53.511 37.336,53.411 37.686,53.411 38.236,53.961 IC49O.4@38.236,54.661 ; C128P.1@37.477,36.252 37.477,37.817 ; IC51P.3@37.586,33.511 37.88,33.511 v1(38.527,32.864) 38.527,32.321 C127P.1@38.686,32.161 ; D12O.1@37.689,63.11 37.689,62.226 v1(37.701,62.214) ; J40.c21@38.562,11.336 J40.d22@39.832,12.606 39.832,12.705 v1(40.31,13.183) ; IC49P.2@38.986,37.411 38.986,36.261 39.086,36.161 39.436,36.161 39.986,36.711 IC49P.4@39.986,37.411 ; v1(39.268,25.857) 39.284,25.873 R298.2@40.043,25.873 ; D12P.1@39.439,45.86 39.439,44.976 v1(39.451,44.964) ; C128Q.1@39.477,53.502 39.477,55.067 ; IC51Q.3@39.586,50.761 39.88,50.761 v1(40.527,50.114) 40.527,49.571 C127Q.1@40.686,49.411 ; R299.2@40.043,24.933 R298.2@40.043,25.873 ; R293.2@40.043,30.521 R294.2@40.043,29.582 R295.2@40.043,28.667 R296.2@40.043,27.753 R297.2@40.043,26.813 R298.2@40.043,25.873 ; IC49Q.2@40.986,54.661 40.986,53.511 41.086,53.411 41.436,53.411 41.986,53.961 IC49Q.4@41.986,54.661 ; J40.g23@41.102,16.416 J40.h24@42.372,17.686 42.36,17.686 v1(41.758,18.288) ; C128R.1@41.227,36.252 41.227,37.817 ; IC51R.3@41.336,33.511 41.63,33.511 v1(42.277,32.864) 42.277,32.321 C127R.1@42.436,32.161 ; D12Q.1@41.439,63.11 41.439,62.226 v1(41.451,62.214) ; v1(42.367,10.592) 42.372,10.597 J40.c24@42.372,11.336 ; IC58.8@42.567,25.259 43.728,25.259 v1(43.739,25.248) ; IC49R.2@42.736,37.411 42.736,36.261 42.836,36.161 43.186,36.161 43.736,36.711 IC49R.4@43.736,37.411 ; D12R.1@43.189,45.86 43.189,44.976 v1(43.201,44.964) ; C128S.1@43.227,53.502 43.227,55.067 ; IC51S.3@43.336,50.761 43.63,50.761 v1(44.277,50.114) 44.277,49.571 C127S.1@44.436,49.411 ; v1(43.637,10.643) 43.642,10.648 J40.c25@43.642,11.336 J40.c24@42.372,11.336 ; J40.d25@43.642,12.606 J40.c24@42.372,11.336 ; IC49S.2@44.736,54.661 44.736,53.511 44.836,53.411 45.186,53.411 45.736,53.961 IC49S.4@45.736,54.661 ; C128T.1@44.977,36.252 44.977,37.817 ; IC51T.3@45.086,33.511 45.38,33.511 v1(46.027,32.864) 46.027,32.321 C127T.1@46.186,32.161 ; D12S.1@45.189,63.11 45.189,62.226 v1(45.201,62.214) ; v1(45.441,15.799) 44.912,16.327 J40.g26@44.912,16.416 J40.h27@46.182,17.686 ; IC49T.2@46.486,37.411 46.486,36.261 46.586,36.161 46.936,36.161 47.486,36.711 IC49T.4@47.486,37.411 ; D12T.1@46.939,45.86 46.939,44.976 v1(46.951,44.964) ; C128U.1@46.977,53.502 46.977,55.067 ; IC51U.3@47.086,50.761 47.38,50.761 v1(48.027,50.114) 48.027,49.571 C127U.1@48.186,49.411 ; v1(47.422,10.49) 47.452,10.521 J40.c28@47.452,11.336 J40.d28@47.452,12.606 ; v1(48.209,15.9) 48.209,15.903 J40.g29@48.722,16.416 ; IC58.13@48.467,27.859 49.586,27.859 v1(49.632,27.813) 50.584,27.813 R292.2@50.749,27.648 ; IC49U.2@48.486,54.661 48.486,53.511 48.586,53.411 48.936,53.411 49.486,53.961 IC49U.4@49.486,54.661 ; v1(48.717,10.643) 48.722,10.648 J40.c29@48.722,11.336 ; C128V.1@48.727,36.252 48.727,37.817 ; IC51V.3@48.836,33.511 49.13,33.511 v1(49.777,32.864) 49.777,32.321 C127V.1@49.936,32.161 ; D12U.1@48.939,63.11 48.939,62.226 v1(48.951,62.214) ; J40.h30@49.992,17.686 49.992,17.597 v1(50.546,17.043) ; IC49V.2@50.236,37.411 50.236,36.261 50.336,36.161 50.686,36.161 51.236,36.711 IC49V.4@51.236,37.411 ; D12V.1@50.689,45.86 50.689,44.976 v1(50.701,44.964) ; C128W.1@50.727,53.502 50.727,55.067 ; IC51W.3@50.836,50.761 51.13,50.761 v1(51.777,50.114) 51.777,49.571 C127W.1@51.936,49.411 ; C154.1@51.123,30.074 52.019,30.074 v1(52.045,30.048) ; v1(51.994,15.824) 51.994,15.877 J40.g32@52.532,16.416 J40.h33@53.802,17.686 ; IC49W.2@52.236,54.661 52.236,53.511 52.336,53.411 52.686,53.411 53.236,53.961 IC49W.4@53.236,54.661 ; C128X.1@52.477,36.252 52.477,37.817 ; v1(52.527,10.617) 52.532,10.622 J40.c32@52.532,11.336 ; IC51X.3@52.586,33.511 52.88,33.511 v1(53.527,32.864) 53.527,32.321 C127X.1@53.686,32.161 ; D12W.1@52.689,63.11 52.689,62.226 v1(52.701,62.214) ; v1(53.467,25.668) 53.57,25.772 R306.2@54.242,25.772 ; v1(53.797,10.566) 53.802,10.571 J40.c33@53.802,11.336 ; IC49X.2@53.986,37.411 53.986,36.261 54.086,36.161 54.436,36.161 54.986,36.711 IC49X.4@54.986,37.411 ; R307.2@54.242,24.811 R306.2@54.242,25.772 ; R301.2@54.242,30.547 R302.2@54.242,29.582 R303.2@54.242,28.642 R304.2@54.242,27.702 R305.2@54.242,26.737 R306.2@54.242,25.772 ; D12X.1@54.439,45.86 54.439,44.976 v1(54.451,44.964) ; C128Y.1@54.477,53.502 54.477,55.067 ; IC51Y.3@54.586,50.761 54.88,50.761 v1(55.527,50.114) 55.527,49.571 C127Y.1@55.686,49.411 ; IC49Y.2@55.986,54.661 55.986,53.511 56.086,53.411 56.436,53.411 56.986,53.961 IC49Y.4@56.986,54.661 ; C128Z.1@56.227,36.252 56.227,37.817 ; IC51Z.3@56.336,33.511 56.63,33.511 v1(57.277,32.864) 57.277,32.321 C127Z.1@57.436,32.161 ; J40.g35@56.342,16.416 56.342,15.016 v2(56.363,15.037) ; D12Y.1@56.439,63.11 56.439,62.226 v1(56.451,62.214) ; IC59.8@57.197,25.03 58.18,25.03 58.242,24.968 ; v1(57.607,10.693) 57.612,10.698 J40.c36@57.612,11.336 ; J40.h36@57.612,17.686 57.612,18.598 v2(58.064,19.05) ; IC49Z.2@57.736,37.411 57.736,36.261 57.836,36.161 58.186,36.161 58.736,36.711 IC49Z.4@58.736,37.411 ; D12Z.1@58.189,45.86 58.189,44.976 v1(58.201,44.964) ; C128[.1@58.227,53.502 58.227,55.067 ; IC51[.3@58.336,50.761 58.63,50.761 v1(59.277,50.114) 59.277,49.571 C127[.1@59.436,49.411 ; J40.d37@58.882,12.606 J40.c38@60.152,11.336 60.152,10.597 v1(60.122,10.566) ; IC49[.2@59.736,54.661 59.736,53.511 59.836,53.411 60.186,53.411 60.736,53.961 IC49[.4@60.736,54.661 ; C128\.1@59.977,36.252 59.977,37.817 ; IC51\.3@60.086,33.511 60.38,33.511 v1(61.027,32.864) 61.027,32.321 C127\.1@61.186,32.161 ; v2(60.122,15.494) 60.122,16.385 J40.g38@60.152,16.416 ; D12[.1@60.189,63.11 60.189,62.226 v1(60.201,62.214) ; J40.d39@61.422,12.606 61.963,12.065 v1(61.976,12.065) ; J40.h39@61.422,17.686 61.422,18.12 62.103,18.801 v2(62.103,18.847) ; IC49\.2@61.486,37.411 61.486,36.261 61.586,36.161 61.936,36.161 62.486,36.711 IC49\.4@62.486,37.411 ; D12\.1@61.939,45.86 61.939,44.976 v1(61.951,44.964) ; C128].1@61.977,53.502 61.977,55.067 ; IC51].3@62.086,50.761 62.38,50.761 v1(63.027,50.114) 63.027,49.571 C127].1@63.186,49.411 ; v1(62.687,10.617) 62.692,10.622 J40.c40@62.692,11.336 ; J40.g40@62.692,16.416 62.692,15.768 v1(62.738,15.723) ; IC59.13@63.097,27.63 64.409,27.63 v1(64.414,27.635) 64.503,27.635 R308.2@65.075,27.064 66.014,27.064 R300.2@66.04,27.038 ; IC49].2@63.486,54.661 63.486,53.511 63.586,53.411 63.936,53.411 64.486,53.961 IC49].4@64.486,54.661 ; C128^.1@63.727,36.252 63.727,37.817 ; IC51^.3@63.836,33.511 64.13,33.511 v1(64.777,32.864) 64.777,32.321 C127^.1@64.936,32.161 ; D12].1@63.939,63.11 63.939,62.226 v1(63.951,62.214) ; IC49^.2@65.236,37.411 65.236,36.261 65.336,36.161 65.686,36.161 66.236,36.711 IC49^.4@66.236,37.411 ; C153.1@65.499,29.794 v1(66.827,29.794) ; D12^.1@65.689,45.86 65.689,44.976 v1(65.701,44.964) ; C128_.1@65.727,53.502 65.727,55.067 ; IC51_.3@65.836,50.761 66.13,50.761 v1(66.777,50.114) 66.777,49.571 C127_.1@66.936,49.411 ; IC49_.2@67.236,54.661 67.236,53.511 67.336,53.411 67.686,53.411 68.236,53.961 IC49_.4@68.236,54.661 ; C128`.1@67.477,36.252 67.477,37.817 ; v1(67.544,20.353) C163.1@68.174,20.353 ; IC51`.3@67.586,33.511 67.88,33.511 v1(68.527,32.864) 68.527,32.321 C127`.1@68.686,32.161 ; D12_.1@67.689,63.11 67.689,62.226 v1(67.701,62.214) ; C166.1@67.818,9.964 69.248,9.964 IC61.9@69.621,10.338 ; C164.1@68.605,29.584 v1(68.605,30.455) ; IC49`.2@68.986,37.411 68.986,36.261 69.086,36.161 69.436,36.161 69.986,36.711 IC49`.4@69.986,37.411 ; IC61.7@69.371,11.838 69.371,10.588 IC61.9@69.621,10.338 ; D12`.1@69.439,45.86 69.439,44.976 v1(69.451,44.964) ; C159.2@69.672,51.809 70.275,51.809 v1(70.307,51.841) ; IC61.3@69.871,8.838 IC61.9@69.871,10.088 ; IC61.4@70.371,8.838 70.371,9.588 IC61.9@69.871,10.088 ; v1(70.891,10.262) 70.815,10.338 IC61.9@69.621,10.338 ; IC60.4@70.901,22.894 70.901,21.656 v1(70.917,21.641) ; R263.2@9.352,25.387 9.36,25.395 9.36,27.504 ; 9.36,27.504 9.373,27.504 9.373,29.721 R258.2@9.36,29.734 ; 9.36,27.504 R259.2@9.36,28.82 R258.2@9.36,29.734 ; IC61.9@69.621,10.338 IC61.9@69.871,10.088
  Bottom Layer w0.102: v1(9.93,55.52) 9.978,55.472 IC50A.4@9.978,54.661 ; v1(11.68,38.27) 11.728,38.222 IC50B.4@11.728,37.411 ; v1(13.68,55.52) 13.728,55.472 IC50C.4@13.728,54.661 ; v1(15.43,38.27) 15.478,38.222 IC50D.4@15.478,37.411 ; v1(17.43,55.52) 17.478,55.472 IC50E.4@17.478,54.661 ; v1(19.18,38.27) 19.228,38.222 IC50F.4@19.228,37.411 ; v1(21.18,55.52) 21.228,55.472 IC50G.4@21.228,54.661 ; v1(22.93,38.27) 22.978,38.222 IC50H.4@22.978,37.411 ; v1(24.93,55.52) 24.978,55.472 IC50I.4@24.978,54.661 ; v1(26.68,38.27) 26.728,38.222 IC50J.4@26.728,37.411 ; v1(28.68,55.52) 28.728,55.472 IC50K.4@28.728,54.661 ; v1(30.43,38.27) 30.478,38.222 IC50L.4@30.478,37.411 ; v1(32.43,55.52) 32.478,55.472 IC50M.4@32.478,54.661 ; v1(34.18,38.27) 34.228,38.222 IC50N.4@34.228,37.411 ; v1(36.18,55.52) 36.228,55.472 IC50O.4@36.228,54.661 ; v1(37.93,38.27) 37.978,38.222 IC50P.4@37.978,37.411 ; v1(39.93,55.52) 39.978,55.472 IC50Q.4@39.978,54.661 ; v1(41.68,38.27) 41.728,38.222 IC50R.4@41.728,37.411 ; v1(43.68,55.52) 43.728,55.472 IC50S.4@43.728,54.661 ; v1(45.43,38.27) 45.478,38.222 IC50T.4@45.478,37.411 ; v1(47.43,55.52) 47.478,55.472 IC50U.4@47.478,54.661 ; v1(49.18,38.27) 49.228,38.222 IC50V.4@49.228,37.411 ; v1(51.18,55.52) 51.228,55.472 IC50W.4@51.228,54.661 ; v1(52.93,38.27) 52.978,38.222 IC50X.4@52.978,37.411 ; v1(54.93,55.52) 54.978,55.472 IC50Y.4@54.978,54.661 ; v1(56.68,38.27) 56.728,38.222 IC50Z.4@56.728,37.411 ; v1(58.68,55.52) 58.728,55.472 IC50[.4@58.728,54.661 ; v1(60.43,38.27) 60.478,38.222 IC50\.4@60.478,37.411 ; v1(62.43,55.52) 62.478,55.472 IC50].4@62.478,54.661 ; v1(64.18,38.27) 64.228,38.222 IC50^.4@64.228,37.411 ; v1(66.18,55.52) 66.228,55.472 IC50_.4@66.228,54.661 ; v1(67.93,38.27) 67.978,38.222 IC50`.4@67.978,37.411
  Bottom Layer w0.152: IC50A.2@10.978,54.661 10.978,53.519 11.086,53.411 11.436,53.411 ; C139A.1@11.347,62.865 11.347,62.319 v1(11.451,62.214) ; IC50B.2@12.728,37.411 12.728,36.269 12.836,36.161 13.186,36.161 ; C139D.1@13.15,45.669 13.15,45.015 v1(13.201,44.964) ; C139C.1@13.741,61.562 13.81,61.562 14.462,62.214 v1(15.201,62.214) ; IC50C.2@14.728,54.661 14.728,53.519 14.836,53.411 15.186,53.411 ; IC50D.2@16.478,37.411 16.478,36.269 16.586,36.161 16.936,36.161 ; C139F.1@16.935,45.644 16.935,44.981 v1(16.951,44.964) ; IC50E.2@18.478,54.661 18.478,53.519 18.586,53.411 18.936,53.411 ; C139E.1@18.905,62.89 18.905,62.26 v1(18.951,62.214) ; C160.2@19.932,13.97 19.932,13.342 v1(20.066,13.208) ; IC50F.2@20.228,37.411 20.228,36.269 20.336,36.161 20.686,36.161 ; C139H.1@20.694,45.644 20.694,44.971 v1(20.701,44.964) ; IC50G.2@22.228,54.661 22.228,53.519 22.336,53.411 22.686,53.411 ; C139G.1@22.675,62.865 22.675,62.24 v1(22.701,62.214) ; C161.2@23.419,13.393 23.92,13.393 v1(24.13,13.183) ; IC50H.2@23.978,37.411 23.978,36.269 24.086,36.161 24.436,36.161 ; C139J.1@24.351,45.669 24.351,45.064 v1(24.451,44.964) ; IC50I.2@25.978,54.661 25.978,53.519 26.086,53.411 26.436,53.411 ; C139I.1@26.434,62.865 26.434,62.231 v1(26.451,62.214) ; IC50J.2@27.728,37.411 27.728,36.269 27.836,36.161 28.186,36.161 ; C139L.1@28.187,45.644 28.187,44.978 v1(28.201,44.964) ; IC50K.2@29.728,54.661 29.728,53.519 29.836,53.411 30.186,53.411 ; v1(30.201,62.214) 30.244,62.257 C139K.1@30.244,62.89 ; IC50L.2@31.478,37.411 31.478,36.269 31.586,36.161 31.936,36.161 ; C139N.1@31.946,45.618 31.946,44.969 v1(31.951,44.964) ; IC50M.2@33.478,54.661 33.478,53.519 33.586,53.411 33.936,53.411 ; v1(33.951,62.214) v1(33.951,62.214) C139M.1@33.953,62.865 ; IC50N.2@35.228,37.411 35.228,36.269 35.336,36.161 35.686,36.161 ; C139P.1@35.654,45.644 35.654,45.011 v1(35.701,44.964) ; IC50O.2@37.228,54.661 37.228,53.519 37.336,53.411 37.686,53.411 ; v1(37.701,62.214) 37.701,62.854 C139O.1@37.712,62.865 ; IC62.4@38.954,24.343 38.791,24.506 38.791,26.055 39.167,26.431 v1(39.167,27.33) 39.167,27.686 38.954,27.899 IC62.5@38.954,28.743 38.954,29.886 39.395,30.328 C165.1@39.86,30.328 ; IC50P.2@38.978,37.411 38.978,36.269 39.086,36.161 39.436,36.161 ; C139R.1@39.439,45.618 39.439,44.976 v1(39.451,44.964) ; IC50Q.2@40.978,54.661 40.978,53.519 41.086,53.411 41.436,53.411 ; C139Q.1@41.446,62.865 41.451,62.859 v1(41.451,62.214) ; IC50R.2@42.728,37.411 42.728,36.269 42.836,36.161 43.186,36.161 ; v1(43.201,44.964) 43.224,44.986 C139T.1@43.224,45.593 ; IC50S.2@44.728,54.661 44.728,53.519 44.836,53.411 45.186,53.411 ; C139S.1@45.179,62.865 45.179,62.236 v1(45.201,62.214) ; IC50T.2@46.478,37.411 46.478,36.269 46.586,36.161 46.936,36.161 ; v1(46.951,44.964) 46.983,44.996 C139V.1@46.983,45.644 ; C162.2@47.034,13.868 v1(47.65,13.868) ; IC50U.2@48.478,54.661 48.478,53.519 48.586,53.411 48.936,53.411 ; v1(48.951,62.214) 48.951,62.852 C139U.1@48.964,62.865 ; IC50V.2@50.228,37.411 50.228,36.269 50.336,36.161 50.686,36.161 ; C139X.1@50.691,45.644 50.691,44.974 v1(50.701,44.964) ; IC50W.2@52.228,54.661 52.228,53.519 52.336,53.411 52.686,53.411 ; C139W.1@52.698,62.89 52.698,62.217 v1(52.701,62.214) ; IC50X.2@53.978,37.411 53.978,36.269 54.086,36.161 54.436,36.161 ; v1@54.45,44.965 C139Z.1@54.45,45.644 ; IC50Y.2@55.978,54.661 55.978,53.519 56.086,53.411 56.436,53.411 ; v1(56.451,62.214) 56.451,62.885 C139Y.1@56.457,62.89 ; IC50Z.2@57.728,37.411 57.728,36.269 57.836,36.161 58.186,36.161 ; v2(58.064,19.05) IC1.6@58.839,19.05 ; v1(58.201,44.964) 58.286,45.049 C139\.1@58.286,45.669 ; IC50[.2@59.728,54.661 59.728,53.519 59.836,53.411 60.186,53.411 ; v2(60.122,15.494) 60.135,15.507 R2.1@60.135,16.205 ; C139[.1@60.191,62.89 60.191,62.224 v1(60.201,62.214) ; IC50\.2@61.478,37.411 61.478,36.269 61.586,36.161 61.936,36.161 ; C139^.1@61.943,45.618 61.943,44.972 v1(61.951,44.964) ; v2(62.103,18.847) 62.103,19.54 C2.2@62.35,19.787 ; C2.2@62.248,19.888 C1.2@62.248,20.777 ; IC50].2@63.478,54.661 63.478,53.519 63.586,53.411 63.936,53.411 ; C139].1@63.95,62.89 63.951,62.889 v1(63.951,62.214) ; IC50^.2@65.228,37.411 65.228,36.269 65.336,36.161 65.686,36.161 ; v1(65.701,44.964) v1(65.701,44.964) C139`.1@65.703,45.593 ; IC50_.2@67.228,54.661 67.228,53.519 67.336,53.411 67.686,53.411 ; v1(67.701,62.214) 67.735,62.247 C139_.1@67.735,62.865 ; IC50`.2@68.978,37.411 68.978,36.269 69.086,36.161 69.436,36.161 ; v1(69.451,44.964) 69.487,45 C139B.1@69.487,45.618
  other v1: 15.73,22.616 14.739,24.927 58.42,25.146 7.518,35.979 5.715,36.005 12.937,36.192 16.687,36.192 20.437,36.192 24.187,36.192 27.937,36.192 31.687,36.192 35.437,36.192 39.187,36.192 42.937,36.192 46.687,36.192 50.437,36.192 54.187,36.192 57.937,36.192 61.687,36.192 65.437,36.192 69.187,36.192 6.553,36.487 7.493,36.995 5.74,37.021 9.482,47.66 11.187,53.442 14.937,53.442 18.687,53.442 22.437,53.442 26.187,53.442 29.937,53.442 33.687,53.442 37.437,53.442 41.187,53.442 44.937,53.442 48.687,53.442 52.437,53.442 56.187,53.442 59.937,53.442 63.687,53.442 67.437,53.442 8.415,63.129 36.126,66.532 68.587,66.532 21.343,67.853 46.794,67.853 33.434,69.174 56.624,71.612 41.13,71.79 56.624,72.577 64.574,76.108 21.699,78.419 38.565,78.953
HEAC_N: J41.1 R265.1 | length 11.1
  Top Layer w0.102: R265.1@11.201,67.145 10.846,67.501 10.846,69.046 12.59,70.79 12.59,76.24 13.03,76.68 J41.1@13.516,76.68
HEAC_P: J41.2 R268.2 | length 12.4
  Top Layer w0.102: R268.2@10.287,67.145 10.579,67.437 10.579,69.157 12.323,70.9 12.323,76.35 13.338,77.365 13.338,77.905 J41.2@13.716,77.905
LA32_P: IC1.2 J40.h37 R2.2 | length 5.8
  Top Layer w0.102: J40.h37@58.882,17.686 58.899,17.669 58.899,17.098 59.355,16.642 59.355,16.149 59.284,16.078 v2(59.284,15.443)
  Bottom Layer w0.102: v2(59.284,15.443) 59.195,15.532 R2.2@59.195,16.205 59.195,16.243 60.039,17.088 IC1.2@60.039,18.4
LA33_N: IC1.5 J40.g37 | length 2.7
  Top Layer w0.102: v2(58.247,18.001) 58.41,17.838 58.41,17.42 58.695,17.134 58.695,17.014 58.882,16.827 J40.g37@58.882,16.416
  Bottom Layer w0.102: v2(58.247,18.001) 58.247,18.141 58.507,18.4 IC1.5@58.839,18.4
LA33_P: IC1.4 J40.g36 | length 2.8
  Top Layer w0.102: J40.g36@57.612,16.416 57.742,16.416 v2(58.293,16.967)
  Bottom Layer w0.102: v2(58.293,16.967) 58.42,16.967 59.239,17.786 IC1.4@59.239,18.4
LATCH: IC1.10 IC56.12 IC57.12 IC58.12 IC59.12 | length 65.8
  Top Layer w0.102: IC56.12@18.596,27.437 20.407,27.437 20.702,27.142 20.702,25.389 23.063,23.028 33.042,23.028 33.296,23.282 49.06,23.282 49.314,23.028 59.522,23.028 59.919,22.631 ; v1(31.979,24.476) 31.913,24.542 31.913,25.33 31.902,25.341 31.902,26.685 31.913,26.696 31.913,27.139 32.36,27.586 IC57.12@33.336,27.586 ; IC58.12@48.586,27.336 49.433,27.336 ; 49.434,27.335 49.83,27.335 ; 49.83,27.336 49.845,27.336 51.029,26.153 v1@51.029,24.756 ; v2(60.046,20.777) 60.046,22.504 59.919,22.631 ; IC59.12@63.086,27.086 62.071,27.086 60.634,25.649 60.634,24.116 60.731,24.018 60.731,23.444 60.676,23.389 60.676,23.373 60.396,23.093 60.381,23.093 59.919,22.631
  Bottom Layer w0.102: v1(31.979,23.079) v1(31.979,24.476) ; v1@51.054,22.952 v1(51.054,24.756)
  Bottom Layer w0.152: IC1.10@60.039,19.7 60.039,20.771 v2(60.046,20.777)
  other v1: 51.079,22.952